# Altium PCB Lora.PcbDoc
Units mil, origin at the board's own origin, x right, y up, seen from the top; angles counter-clockwise.
Board outline 2320.03 x 1435.03 mil, 2 copper layers (Top Layer, Bottom Layer); 39 components, 28 nets, 166 pads, 17 vias.
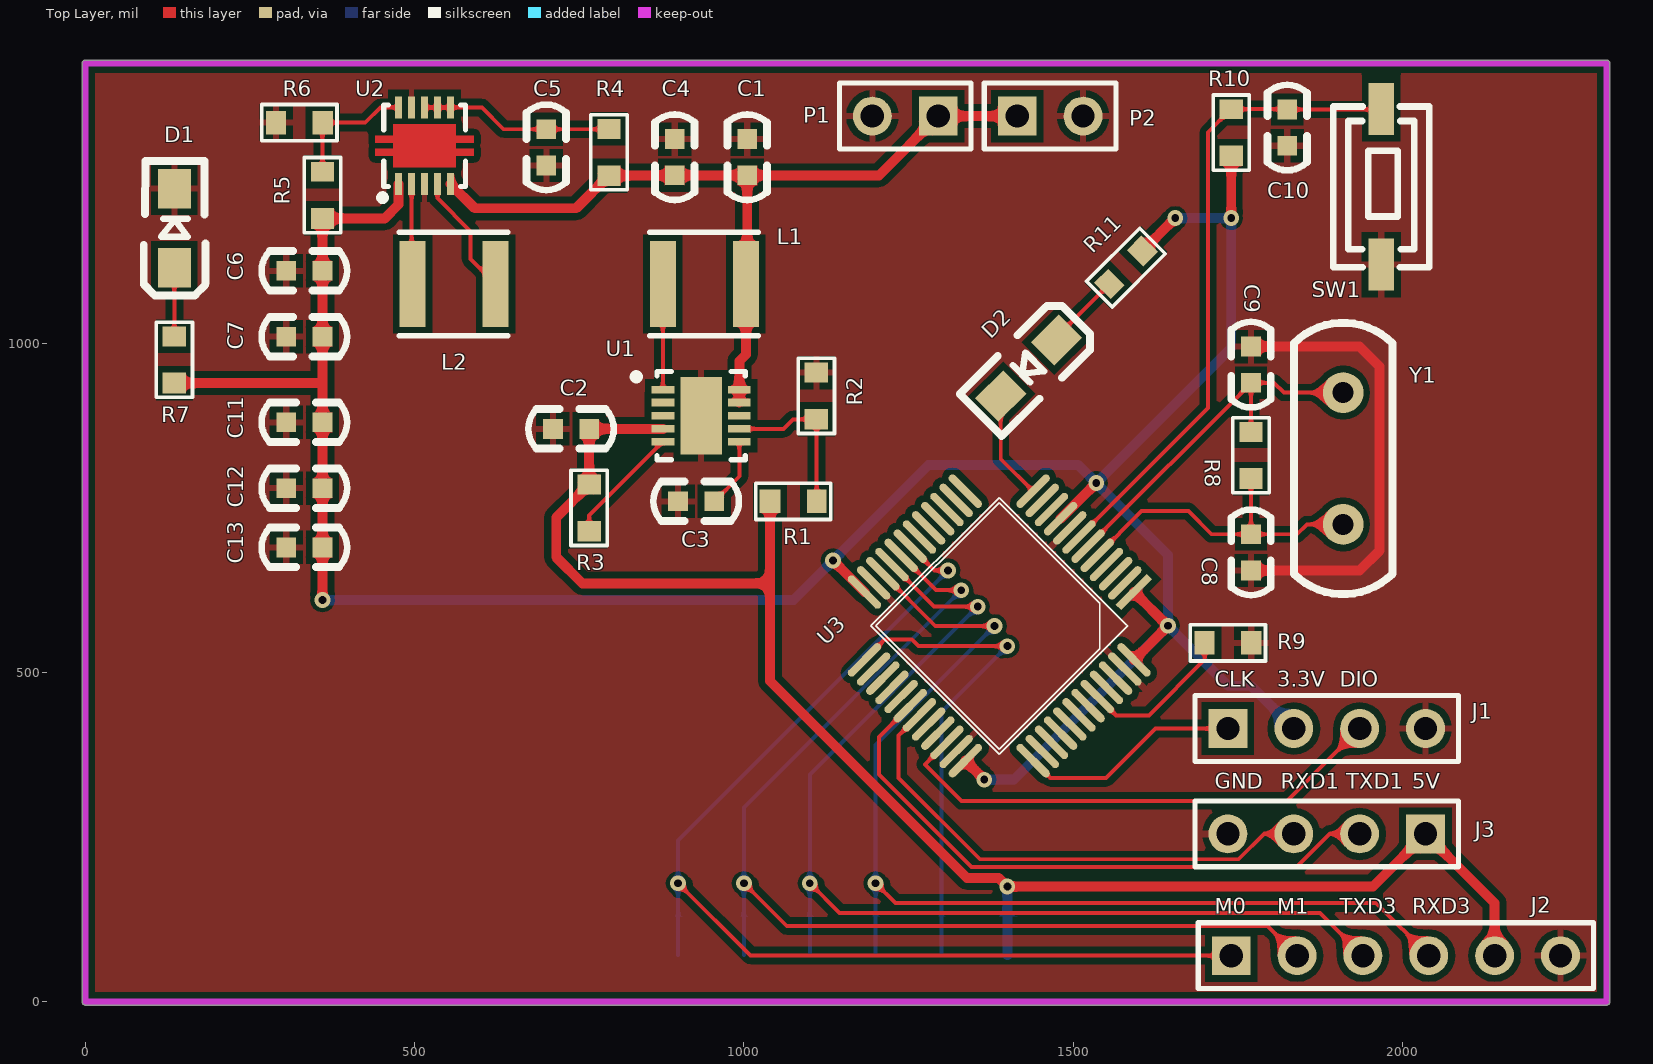
[diagram p0: Top Layer view]
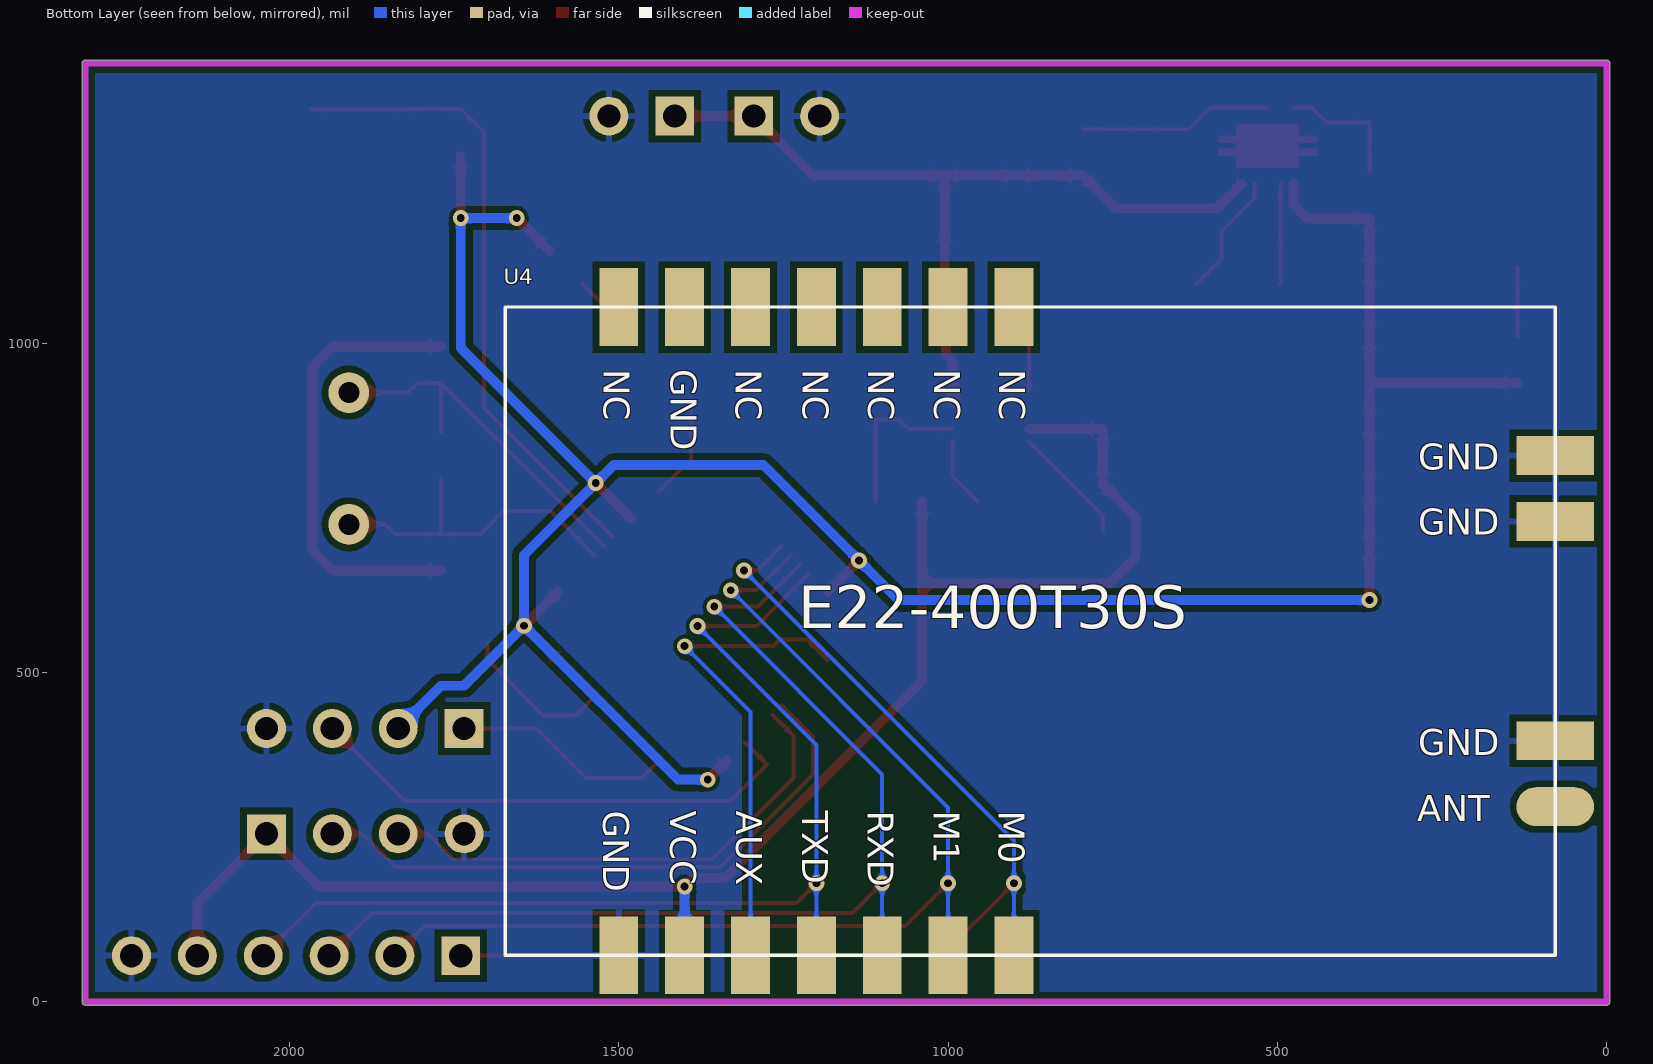
[diagram p1: Bottom Layer view, seen from below]

## Layer stack, top to bottom
Top Solder: solder mask 0.4, Solder Resist, Dk 3.5
Top Layer: signal copper 1.4
Dielectric 1: dielectric 12.6, FR-4, Dk 4.8
Bottom Layer: signal copper 1.4
Bottom Solder: solder mask 0.4, Solder Resist, Dk 3.5

## Board outline
0,-5.01 cw(c0,0) -5.01,0 -5.01,1425 cw(c0,1425) 0,1430.02 2310,1430.02 cw(c2310,1425) 2315.01,1425 2315.01,5 cw(c2310,5) 2314.35,2.5 cw(c2310,0) 2315.01,0 cw(c2310,0) 2310,-5.01

## Design rules (kind name [scope] priority, off if disabled: settings)
Clearance [IsVia vs InPolygon] p1: gap=6
Clearance Poly [InPolygon] p2: gap=10
Clearance All [All] p3: gap=6
MinimumSolderMaskSliver [All] p1: minsoldermaskwidth=2
PolygonConnect PolygonConnect_1 [IsVia] p1: connectstyle=Direct reliefconductorwidth=10 reliefentries=4 polygonreliefangle="90 Angle" airgapwidth=10
PolygonConnect [All] p2: connectstyle=Relief reliefconductorwidth=10 reliefentries=4 polygonreliefangle="90 Angle" airgapwidth=10
RoutingVias [All] p1: holewidth=12 width=24 viastyle="Through Hole" minholewidth=12 minwidth=24 maxholewidth=12 maxwidth=24
SilkToSilkClearance [All] p1: silktosilkclearance=2
SilkToSolderMaskClearance [IsPad] p1: minsilkscreentomaskgap=2 clearancetoexposedcopper=TRUE
SolderMaskExpansion [All] p1: expansion=2.5
Width Width_1 [InNetClass('PWR')] p1: maxlimit=60 minlimit=8 preferedwidth=15
Width [All] p2: maxlimit=6 minlimit=6 preferedwidth=6
27 further rules are at their usual default settings.

## Classes and differential pairs
net class PWR: +3.3V +3.7V +5V GND

## Components (designator, comment, footprint, x,y, rotation, side; value= is the part's Value field where it differs from the comment)
C1 "Cap1" 0603C#1 1005,1305 r270 top
C2 "Cap2" 0603C#1 715,870 r0 top
C3 "Cap3" 0603C#1 905,760 r0 top
C4 "Cap4" 0603C#1 895,1305 r270 top
C5 "Cap5" 0603C#1 700,1275 r90 top
C6 "Cap6" 0603C#1 310,1110 r0 top
C7 "Cap7" 0603C#1 310,1010 r0 top
C8 "Cap8" 0603C#1 1770,705 r270 top
C9 "Cap9" 0603C#2 1770,950 r90 top
C10 "Cap10" 0603C#3 1935,1350 r270 top
C11 "Cap11" 0603C#1 355,880 r180 top
C12 "Cap12" 0603C#1 355,780 r180 top
C13 "Cap13" 0603C#1 355,690 r180 top
D1 "LED1" 贴片二极管 135,1235 r270 top
D2 "LED2" 贴片二极管 1390,920 r45 top
J1 "JTAG" HDR1X4 1735,415 r0 top
J2 "Lora" HDR1X6 1740,70 r0 top
J3 "串口1" HDR1X4 2035,255 r180 top
L1 "Inductor1" IND-SMD_L4.0-W4.0_SMNR4020 940,1090 r180 top
L2 "Inductor2" IND-SMD_L4.0-W4.0_SMNR4020 560,1090 r180 top
P1 "Header 2" HDR1X2 1295,1345 r180 top
P2 "Header 2" HDR1X2 1415,1345 r0 top
R1 "Res1" 0603R 1075,760 r180 top
R2 "Res2" 0603R 1110,920 r270 top
R3 "Res3" 0603R 765,750 r270 top
R4 "Res4" 0603R 795,1290 r270 top
R5 "Res5" 0603R 360,1225 r270 top
R6 "Res6" 0603R 325,1335 r0 top
R7 "Res7" 0603R 135,975 r270 top
R8 "Res8" 0603R 1770,830 r270 top
R9 "Res9" 0603R 1735,545 r0 top
R10 "Res10" 0603R 1740,1320 r270 top
R11 "Res11" 0603R 1580,1115 r45 top
SW1 "SW-1" SW-1 1970,1240 r270 top
U1 "TPS61230" VSON-10_L3.0-W3.0-P0.50-BL-EP 935,890 r270 top
U2 "TPS63000" SON-10_L3.1-W3.1-P0.50-BL-EP 515,1300 r0 top
U3 "STM32L151" TQFP48 1390,575 r225 top
U4 "E22-400T30S" PE32(915T30S) 900,70.75 r180 bottom
Y1 "8MHz" XTAL 1910,935 r270 top

## Footprints (in the part's own frame and the unit in brackets; to place one, negate y for a bottom-side part, rotate by r counter-clockwise, add the part's x,y. Pads: shape width x height; smd on the part's side, far side on the other; paste and mask are expansions set on the pad)
0603C#1 [mil]
  rect 30x30 smd: 1(-5,0) 2(50,0)
  silkscreen extent -42,-30 87,30
0603C#2 [mil]
  rect 30x30 smd: 1(-10,0) 2(45,0)
  silkscreen extent -47,-30 82,30
0603C#3 [mil]
  rect 30x30 smd: 1(-5,-110) 2(50,-110)
  silkscreen extent -42,-140 87,-80
0603R [mm]
  rect 0.762x0.9 smd: 1(-0.9,0)
  rect 0.8x0.9 smd: 2(0.9,0)
  silkscreen extent -1.45,-0.7 1.45,0.7, body extent -0.85,-0.4 0.85,0.4, height 0.56
HDR1X2 [mm] "Connector; Header; 2 Position"
  rect 1.5x1.5 hole 0.9: 1(0,0)
  round 1.5 hole 0.9: 2(2.54,0)
  silkscreen extent -1.27,-1.27 3.81,1.27
HDR1X4 [mm] "Connector; Header; 4 Position"
  rect 1.5x1.5 hole 0.9: 1(0,0)
  round 1.5 hole 0.9: 2(2.54,0) 3(5.08,0) 4(7.62,0)
  silkscreen extent -1.27,-1.27 8.89,1.27
HDR1X6 [mm] "Connector; Header; 6 Position"
  rect 1.5x1.5 hole 0.9: 1(0,0)
  round 1.5 hole 0.9: 2(2.54,0) 3(5.08,0) 4(7.62,0) 5(10.16,0) 6(12.7,0)
  silkscreen extent -1.27,-1.27 13.97,1.27
IND-SMD_L4.0-W4.0_SMNR4020 [mm]
  rect 1x3.3 smd: 1(-1.6,0) 2(1.6,0)
  silkscreen extent -2.08,-2 2.12,2
PE32(915T30S) [mm] "40.5mm*25mm*3.80mm-S"
  rect 1.5x3 smd: 1(0,0) 2(-2.54,0) 3(-5.08,0) 4(-7.62,0) 5(-10.16,0) 6(-12.7,0) 7(-15.24,0) 8(-15.24,25) 9(-12.7,25) 10(-10.16,25) 11(-7.62,25) 12(-5.08,25) 13(-2.54,25) 14(0,25)
  rect 3x1.5 smd: 15(20.88,19.27) 16(20.88,16.73) 17(20.88,8.27)
  oval 3x1.5 smd: 18(20.88,5.73)
  silkscreen extent -19.62,0 20.88,25
SON-10_L3.1-W3.1-P0.50-BL-EP [mm]
  rect 0.28x0.85 smd: 1(-1,-1.475) 2(-0.5,-1.475) 3(0,-1.475) 4(0.5,-1.475) 5(1,-1.475) 6(1,1.475) 7(0.5,1.475) 8(0,1.475) 9(-0.5,1.475) 10(-1,1.475)
  round 0 smd: 11(0,0)
  Top Layer region: 1.199,0.826 1.199,0.39 1.9,0.39 1.9,0.11 1.199,0.11 1.199,-0.11 1.9,-0.11 1.9,-0.39 1.199,-0.39 1.199,-0.826 -1.199,-0.826 -1.199,-0.39 -1.9,-0.39 -1.9,-0.11 -1.199,-0.11 -1.199,0.11 -1.9,0.11 -1.9,0.39 -1.199,0.39 -1.199,0.826
  silkscreen extent -1.74,-2.12 1.58,1.58
SW-1 [mm]
  rect 2x1 smd: 1(-2.937,-0.055) 2(3.063,-0.055)
  silkscreen extent -3.04,-1.9 3.16,1.8
TQFP48 [mm]
  rect 1.7x0.3 smd: 1(-4.482,2.784)
  oval 1.7x0.3 smd: 2(-4.482,2.284) 3(-4.482,1.784) 4(-4.482,1.284) 5(-4.482,0.784) 6(-4.482,0.284) 7(-4.482,-0.216) 8(-4.482,-0.716) 9(-4.482,-1.216) 10(-4.482,-1.716) 11(-4.482,-2.216) 12(-4.482,-2.716) 25(4.718,-2.716) 26(4.718,-2.216) 27(4.718,-1.716) 28(4.718,-1.216) 29(4.718,-0.716) 30(4.718,-0.216) 31(4.718,0.284) 32(4.718,0.784) 33(4.718,1.284) 34(4.718,1.784) 35(4.718,2.284) 36(4.718,2.784)
  oval 0.3x1.7 smd: 13(-2.632,-4.566) 14(-2.132,-4.566) 15(-1.632,-4.566) 16(-1.132,-4.566) 17(-0.632,-4.566) 18(-0.132,-4.566) 19(0.368,-4.566) 20(0.868,-4.566) 21(1.368,-4.566) 22(1.868,-4.566) 23(2.368,-4.566) 24(2.868,-4.566) 37(2.868,4.634) 38(2.368,4.634) 39(1.868,4.634) 40(1.368,4.634) 41(0.868,4.634) 42(0.368,4.634) 43(-0.132,4.634) 44(-0.632,4.634) 45(-1.132,4.634) 46(-1.632,4.634) 47(-2.132,4.634) 48(-2.632,4.634)
  silkscreen extent -3.38,-3.47 3.62,3.53
VSON-10_L3.0-W3.0-P0.50-BL-EP [mil]
  rect 11.5x34.5 smd: 1(-39.37,-57.97) 2(-20.06,-58.02) 3(-0.06,-58.02) 4(19.94,-58.02) 5(39.36,-57.97) 6(39.36,58.03) 7(19.94,57.98) 8(-0.06,57.98) 9(-20.06,57.98) 10(-39.38,58.03)
  rect 118.11x62.99 smd: 11(-0.06,-0.02)
  silkscreen extent -67,-103 67,67
XTAL [mil]
  round 62 hole 32: 1(10,0) 2(210,0)
  silkscreen extent -96,-75 316,75
贴片二极管 [mil]
  rect 60x50 smd: 1(120,0) 2(0,0)
  silkscreen extent -42,-46 162,47

## Part data
C1 C2 C3 C4 C5 C6 C7 C8 C9 C10 C11 C12 C13: library part Cap, "Capacitor"
D1: "Typical RED GaAs LED"
D2: library part LED1, "Typical RED GaAs LED"
J1 J3: library part "Header 4", "Header, 4-Pin"
J2: library part "Header 6", "Header, 6-Pin"
L1 L2: library part Inductor, "Inductor"
P1 P2: "Header, 2-Pin"
R1 R3 R4 R5 R6 R7 R8 R9 R10 R11: library part Res2, "Resistor"
R2: "Resistor"
Y1: library part XTAL, "Crystal Oscillator"

## Via types
v1: diameter 24, hole 12, Top Layer to Bottom Layer, 17 vias

## Nets (pads, with @x,y where several pads share a name; then routed paths per layer and width w, separated by ;. In a path a pad name is that pad's centre, name@x,y a point inside that pad or via, vN(x,y) a via of type N, cw(c..) or ccw(c..) an arc to the next point about the centre after c; other vN are vias at no path point)
+3.3V: C6.2 C7.2 C11.1 C12.1 C13.1 J1.2 R5.2 R7.2 R10.2 R11.2 U2.1 U3.1 U3.9 U3.24 U3.36 U3.48 | length 4193.2
  Top Layer w15: R7.2 359.57,939.57 360,940 ; v1(360,610) C13.1 C12.1 C11.1 360,940 ; U2.1 475.63,1210.63 454.57,1189.57 R5.2 C6.2 C7.2 360,940 ; v1(1135.32,670) U3.24 ; U3.36 v1(1365,337.31) ; U3.9 v1(1535,787.7) ; U3.48 v1(1644.01,570.99) 1643.55,570.99 U3.1 ; R11.2 v1(1655,1190) ; v1(1740,1190) R10.2
  Bottom Layer w15: v1(360,610) 1075.32,610 v1(1135.32,670) 1280.32,815 1507.7,815 v1(1535,787.7) ; v1(1365,337.31) 1410.33,337.31 v1(1644.01,570.99) ; v1(1655,1190) v1(1740,1190) 1740,992.7 v1(1535,787.7) ; J1.2 1770,480 1735,480 v1(1644.01,570.99) ; v1(1535,787.7) 1644.01,678.7 v1(1644.01,570.99)
+3.7V: C1.2 C4.2 L1.1 P1.1 P2.1 R4.2 U1.9 U1.10 U2.5 | length 1283.8
  Top Layer w15: U2.5 591.3,1205 745.43,1205 R4.2 894.57,1254.57 C4.2 C1.2 ; U1.9 992.98,929.32 U1.10 993.03,973.03 1002.99,982.99 L1.1@1002.99,1089 ; L1.1 L1.1@1002.99,1089 ; L1.1@1005,1091 L1.1@1002.99,1089 ; L1.1@1005,1092.01 C1.2 ; P2.1 P1.1 1205,1255 C1.2
+5V: C2.2 J2.5 J3.1 R1.2 R3.1 U1.4 U4.6 | length 2432.5
  Top Layer w15: U1.4 876.92,870 C2.2 R3.1 715,735.43 715,675 755,635 755.43,635.43 1039.57,635.43 ; R1.2 1039.57,635.43 ; J2.5 2140,150 J3.1 1955,175 v1(1400,175) 1387.03,187.97 1338.69,187.97 1039.57,487.1 1039.57,635.43
  Bottom Layer w15: U4.6 v1(1400,175)
AUX: U3.25 U4.5 | length 744.5
  Top Layer w6: U3.25 1213.78,550 1255,550 1265,540 v1(1400,540)
  Bottom Layer w6: U4.5 1300,440 v1(1400,540)
GND: C1.1 C2.1 C3.1 C4.1 C5.1 C6.1 C7.1 C8.2 C9.2 C10.2 C11.2 C12.2 C13.2 D1.2 J1.4 J2.6 J3.4 P1.2 P2.2 R2.1 R6.1 R9.2 SW1.2 U1.11 U2.3 U2.9 U3.8 U3.23 U3.35 U3.47 U4.7 U4.15 U4.16 U4.17 | length 694.9
  Top Layer w15: C8.2 1935,655 1965,685 1965,965 1935,995 C9.2
LED: D2.2 U3.12 | length 165
  Top Layer w6: D2.2 1390,824.55 U3.12
M0: J2.1 U3.19 U4.1 | length 1712.3
  Top Layer w6: v1(900,180) 1010,70 J2.1 ; U3.19 1289.51,655 v1(1310,655)
  Bottom Layer w6: U4.1 v1(900,180) 900,245 v1(1310,655)
M1: J2.2 U3.20 U4.2 | length 1689.7
  Top Layer w6: v1(1000,180) 1065,115 1795,115 J2.2 ; U3.20 1291.67,625 v1(1330,625)
  Bottom Layer w6: U4.2 v1(1000,180) 1000,295 v1(1330,625)
NetC3_2: C3.2 U1.6 | length 106.4
  Top Layer w6: C3.2 993.03,798.03 U1.6
NetC5_2: C5.2 R4.1 U2.6 U2.7 U2.8 | length 293.9
  Top Layer w6: U2.8 U2.7 U2.6 601.93,1358.07 635,1325 C5.2 794.57,1325 R4.1
NetD1_1: D1.1 R7.1 | length 104.6
  Top Layer w6: R7.1 D1.1
NetD2_1: D2.1 R11.1 | length 118.3
  Top Layer w6: D2.1 1474.85,1009.85 R11.1
NetL1_2: L1.2 U1.1 | length 160.6
  Top Layer w6: U1.1 L1.2
NetL2_1: L2.1 U2.4 | length 188.5
  Top Layer w6: U2.4 534.7,1220.3 585,1170 585,1127.99 L2.1
NetL2_2: L2.2 U2.2 | length 152.6
  Top Layer w6: U2.2 495.3,1091.71 L2.2
NetR1_1: R1.1 R2.2 U1.7 | length 247.8
  Top Layer w6: U1.7 1060.05,870.06 1074.57,884.57 R2.2 1110.43,884.13 R1.1
NetR3_2: R3.2 U1.5 | length 182.5
  Top Layer w6: R3.2 765,738.6 U1.5
NetR5_1: R5.1 R6.2 U2.10 | length 199.5
  Top Layer w6: R5.1 360,1334.57 R6.2 425,1335 448.07,1358.07 U2.10
NetR9_1: R9.1 U3.44 | length 235.3
  Top Layer w6: U3.44 1565.19,435 1615,435 1699.57,519.57 R9.1
NRST: C10.1 R10.1 SW1.1 U3.7 | length 973.7
  Top Layer w6: U3.7 1705,902.03 1705,1320.43 R10.1 1824.57,1355.43 C10.1 1967.2,1355 SW1.1
PD0: C8.1 R8.2 U3.5 Y1.2 | length 506.5
  Top Layer w6: U3.5 1603.65,745 1675,745 1710,710 C8.1 ; R8.2 C8.1 ; Y1.2 1855,725 1840,710 C8.1
PD1: C9.1 R8.1 U3.6 Y1.1 | length 570.5
  Top Layer w6: U3.6 C9.1@1770,939.19 ; R8.1 C9.1@1770,939.19 ; Y1.1 1820,925 1805,940 C9.1 C9.1@1770,939.19
RXD1: J3.3 U3.31 | length 776
  Top Layer w6: U3.31 1235,404.19 1235,340 1358.53,216.47 1750.96,216.47 1789.49,255 J3.3
RXD3: J2.4 U3.22 U4.4 | length 1662.7
  Top Layer w6: v1(1200,180) 1230,150 1960,150 J2.4 ; U3.22 1290.5,570.5 v1(1380.5,570.5)
  Bottom Layer w6: U4.4 v1(1200,180) 1200,390 v1(1380.5,570.5)
SWCLK: J1.1 U3.37 | length 337.7
  Top Layer w6: U3.37 1465.32,340 1550,340 1625,415 J1.1
SWDIO: J1.3 U3.34 | length 775.7
  Top Layer w6: U3.34 1275,360.67 1330.67,305 1825,305 J1.3
TXD1: J3.2 U3.30 | length 933.5
  Top Layer w6: U3.30 1205,402.03 1205,345 1345.53,204.47 1838.96,204.47 1889.49,255 J3.2
TXD3: J2.3 U3.21 U4.3 | length 1677.2
  Top Layer w6: v1(1100,180) 1145,135 1875,135 J2.3 ; U3.21 1288.83,600 v1(1355,600)
  Bottom Layer w6: U4.3 v1(1100,180) 1100,345 v1(1355,600)
pads on no net: U1.2 U1.3 U1.8 U2.11 U3.2 U3.3 U3.4 U3.10 U3.11 U3.13 U3.14 U3.15 U3.16 U3.17 U3.18 U3.26 U3.27 U3.28 U3.29 U3.32 U3.33 U3.38 U3.39 U3.40 U3.41 U3.42 U3.43 U3.45 U3.46 U4.8 U4.9 U4.10 U4.11 U4.12 U4.13 U4.14 U4.18

## Polygon pours and split planes (outlines as drawn)
GND on Bottom Layer "BOTTOM" (solid, remove dead copper, pour order 8): -25,1465 -35,1455 -35,-35 2355,-35 2365,-25 2365,1440 2350,1455
GND on Top Layer "TOP" (solid, remove dead copper, pour order 10): -20,1465 -25,1460 -25,-45 2355,-45 2330,-20 2330,1455

## Keep-outs
Keep-Out Layer:
  lines w10: 2310,0 0,0 0,1425 2310,1425 2310,5

## Silkscreen, mask and mechanical layers (free items; w line width, h text height)
Top Overlay:
  text "CLK" at 1715,470 h40
  text "3.3V" at 1810,470 h40
  text "DIO" at 1905,470 h40
  text "GND" at 1715,315 h40
  text "RXD1" at 1815,315 h40
  text "TXD1" at 1915,315 h40
  text "5V" at 2015,315 h40
  text "M0" at 1715,125 h40
  text "M1" at 1810,125 h40
  text "TXD3" at 1905,125 h40
  text "RXD3" at 2015,125 h40

## Text inside footprints (layer, text, board x,y; h text height)
U4: Bottom Overlay "GND" at 285.75,374.69 h39.37; Bottom Overlay "ANT" at 287.62,274.29 h39.37; Bottom Overlay "M0" at 922.72,290.24 h39.37 r90; Bottom Overlay "M1" at 1021.54,290.24 h39.37 r90; Bottom Overlay "RXD" at 1121.93,290.24 h39.37 r90; Bottom Overlay "TXD" at 1221.54,290.24 h39.37 r90; Bottom Overlay "AUX" at 1321.54,290.24 h39.37 r90; Bottom Overlay "VCC" at 1421.93,290.24 h39.37 r90; Bottom Overlay "GND" at 1523.9,290.24 h39.37 r90; Bottom Overlay "NC" at 1523.11,960.2 h39.37 r90; Bottom Overlay "GND" at 1421.14,960.2 h39.37 r90; Bottom Overlay "NC" at 1220.75,960.2 h39.37 r90; Bottom Overlay "NC" at 1121.14,960.2 h39.37 r90; Bottom Overlay "NC" at 1020.75,960.2 h39.37 r90; Bottom Overlay "NC" at 921.93,960.2 h39.37 r90; Bottom Overlay "GND" at 285.75,709.33 h39.37; Bottom Overlay "GND" at 285.75,808.15 h39.37; Bottom Overlay "NC" at 1322.44,960.75 h39.37 r90